# EAGLE board fabisp (EAGLE 5.11)
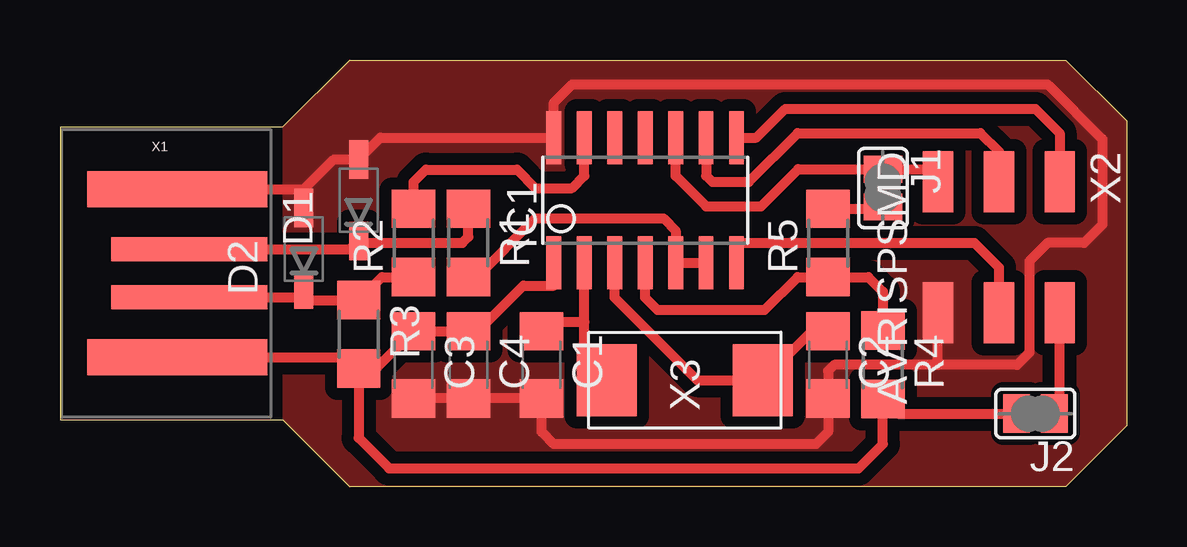
[diagram p0: board, top side]

Size 44.45 x 17.78 mm. Coordinates in mm from the lower left corner, seen from the top.
Outline: 0,2.79 9.27,2.79 12.06,0 41.91,0 44.45,2.54 44.45,15.24 41.91,17.78 12.06,17.78 9.26,14.98 0,14.98 0,2.79
Copper layers (1*16): Top 0.035mm / dielectric 1.5mm / Bottom 0.035mm
Design rules "fab": minimum track width 12mil, minimum drill 0.8mm, track to track 15.5mil, track to pad 15.5mil, pad to pad 15mil, via to via 15mil, smd to smd 10mil, copper to edge 0mil, drill to drill 1mm, minimum pad ring 0.2mm, minimum via ring 0.2mm, stop-mask expansion 4mil, vias tented up to drill 0mil, thermal gap 1mm

## Footprints (pad centres in the part's own frame; a part is rotated, then mirrored left to right if it is on the bottom)
C1206 = smd 1.6 x 1.8: 1 -1.4,0; 2 1.4,0
SOD123 = smd 1.6 x 0.8: ANODE 1.7,0; CATHODE -1.7,0
SOIC14 = smd 0.61 x 2.21: 1 -3.81,-2.603; 2 -2.54,-2.603; 3 -1.27,-2.603; 4 0,-2.603; 5 1.27,-2.603; 6 2.54,-2.603; 7 3.81,-2.603; 8 3.81,2.603; 9 2.54,2.603; 10 1.27,2.603; 11 0,2.603; 12 -1.27,2.603; 13 -2.54,2.603; 14 -3.81,2.603
SJFAB = smd 1.118 x 1.6: 1 -0.787,0; 2 0.787,0
R1206 = smd 1.6 x 1.803: 1 -1.422,0; 2 1.422,0
USB-A-PCB = smd 7.5 x 1.5: 5V -0.2,-3.5; GND -0.2,3.5 | smd 6.5 x 1: USB_M 0.3,-1; USB_P 0.3,1
2X03SMD = smd 2.54 x 1.27: 1 -2.54,2.54; 2 2.92,2.54; 3 -2.54,0; 4 2.92,0; 5 -2.54,-2.54; 6 2.92,-2.54
NX8045GB = smd 2.5 x 3: P$1 3.25,0; P$2 -3.25,0

## Placement (x,y rotation side)
C1  8p  [C1206]  20.07,5.08 270 top
C2  8p  [C1206]  32,5.08 270 top
C3  0.1u  [C1206]  14.73,5.08 270 top
C4  1u  [C1206]  17.02,5.08 270 top
D1  3.3  [SOD123]  12.45,11.94 90 top
D2  3.3  [SOD123]  10.16,9.91 90 top
IC1  ATTINY44-SSU  [SOIC14]  24.38,11.94 0 top
J1  SJ  [SJFAB]  34.29,12.45 270 top
J2  SJ  [SJFAB]  40.64,3.05 180 top
R1  49.9  [R1206]  17.02,10.16 270 top
R2  49.9  [R1206]  14.73,10.16 90 top
R3  10K  [R1206]  12.45,6.35 270 top
R4  10K  [R1206]  34.29,5.08 270 top
R5  0  [R1206]  32,10.16 90 top
X1  USBPCB  [USB-A-PCB]  5.08,8.89 0 top
X2  AVRISPSMD  [2X03SMD]  39.12,10.16 270 top
X3  NX8045GB  [NX8045GB]  26.04,4.45 0 top

## Library data of the parts
C1-C4 R1-R5 = rcl
D1 D2 IC1 J1 J2 X2 = fab
X1 = SparkFun
X3 = ndk

## Nets
D+: IC1.5 IC1.6 R1.2
D-: IC1.13 R2.2
GND: C1.2 C2.2 C3.2 C4.2 D1.ANODE D2.ANODE IC1.14 X1.GND X2.6
MISO: IC1.8 X2.1
MOSI: IC1.7 X2.4
N$1: D1.CATHODE R1.1 X1.USB_P
N$2: D2.CATHODE R2.1 R3.1 X1.USB_M
N$3: IC1.4 R4.1 R5.1
N$4: J2.1 X2.2
N$5: J1.2 R5.2
RST: IC1.10 J1.1 X2.5
SCK: IC1.9 X2.3
VCC: C3.1 C4.1 IC1.1 J2.2 R3.2 R4.2 X1.5V
XTAL1: C1.1 IC1.2 X3.P$2
XTAL2: C2.1 IC1.3 X3.P$1

## Tracks (layer width: path | path; a pad name or v marks a point on that pad's centre or on a via)
D+
  Top 0.406: IC1.6 IC1.5 25.65,10.67 25.15,11.18 19.81,11.18 17.37,8.74 R1.2
D-
  Top 0.406: R2.2 14.73,12.7 15.24,13.21 19.05,13.21 19.81,12.45 21.34,12.45 21.84,12.95 IC1.13
GND
  Top 0.406: C3.2 C4.2 C1.2 20.07,2.29 20.57,1.78 31.5,1.78 32,2.29 C2.2 32,4.83 32.26,5.08 36.58,5.08 | 36.58,5.08 X2.6 | 36.58,5.08 39.88,5.08 40.39,5.59 40.39,9.4 41.15,10.16 42.67,10.16 43.43,10.92 43.43,14.48 41.15,16.76 21.34,16.76 20.57,16 IC1.14 13.35,14.54 D1.ANODE 11.41,13.64 10.16,12.39 | X1.GND 10.16,12.39 | 10.16,12.39 D2.ANODE
  pour Top (isolate 0.508, no thermals): 12.06,17.78 41.91,17.78 44.45,15.24 44.45,2.54 41.91,0 12.06,0 9.27,2.79 9.27,14.99
MISO
  Top 0.406: IC1.8 29.02,14.54 30.23,15.75 40.64,15.75 41.66,14.73 X2.1
MOSI
  Top 0.406: IC1.7 28.19,10.16 38.1,10.16 39.12,9.14 X2.4
N$1
  Top 0.406: D1.CATHODE 12.29,10.4 | D1.CATHODE 12.45,10.16 16.76,10.16 17.02,10.41 R1.1 | X1.USB_P 12.1,9.89 D1.CATHODE
N$2
  Top 0.406: R2.1 13.41,8.74 R3.1 10.16,7.77 D2.CATHODE 9.84,7.89 X1.USB_M
N$3
  Top 0.406: IC1.4 24.38,7.87 24.89,7.37 29.36,7.37 30.73,8.74 R5.1 33.68,8.74 34.29,8.13 R4.1
N$4
  Top 0.406: X2.2 41.66,3.3 J2.1
N$5
  Top 0.406: R5.2 34.21,11.58 J1.2
RST
  Top 0.406: IC1.10 25.65,12.95 26.92,11.68 29.21,11.68 30.76,13.23 J1.1 36.04,13.23 X2.5
SCK
  Top 0.406: IC1.9 26.92,12.95 27.18,12.7 28.7,12.7 30.73,14.73 38.35,14.73 39.12,13.97 X2.3
VCC
  Top 0.406: R3.2 13.18,4.93 C3.1 C4.1 17.4,6.48 19.3,8.38 20.57,8.38 IC1.1 | R3.2 12.45,2.03 13.72,0.76 33.27,0.76 34.29,1.78 R4.2 34.9,3.05 J2.2 | X1.5V 11.98,5.39 R3.2
XTAL1
  Top 0.406: 21.84,6.86 21.84,5.39 X3.P$2 | 21.84,6.86 IC1.2 | C1.1 20.07,6.86 21.84,6.86
XTAL2
  Top 0.406: IC1.3 23.11,7.87 26.54,4.45 X3.P$1 31.32,6.48 C2.1